# Altium PCB PCB1.PcbDoc
Units mm, origin at the board's own origin, x right, y up, seen from the top; angles counter-clockwise.
Board outline 87.76 x 52.71 mm, 2 copper layers (Top Layer, Bottom Layer); 13 components, 10 nets, 75 pads, 0 vias.
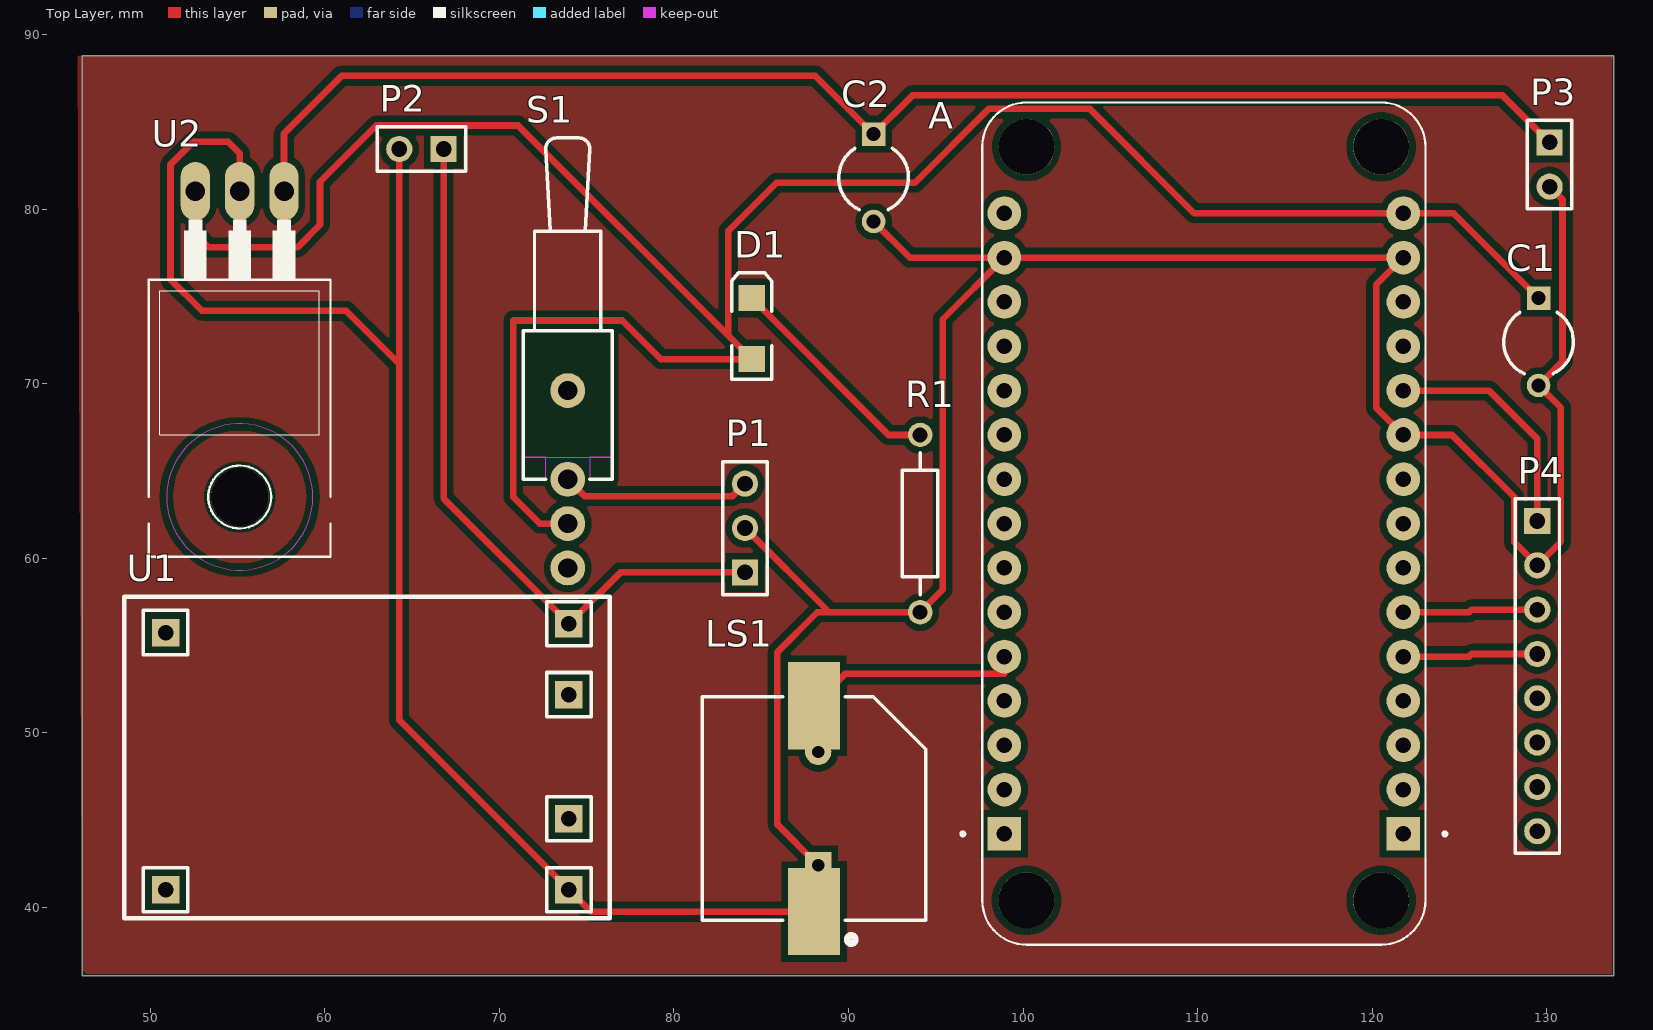
[diagram p0: Top Layer view]
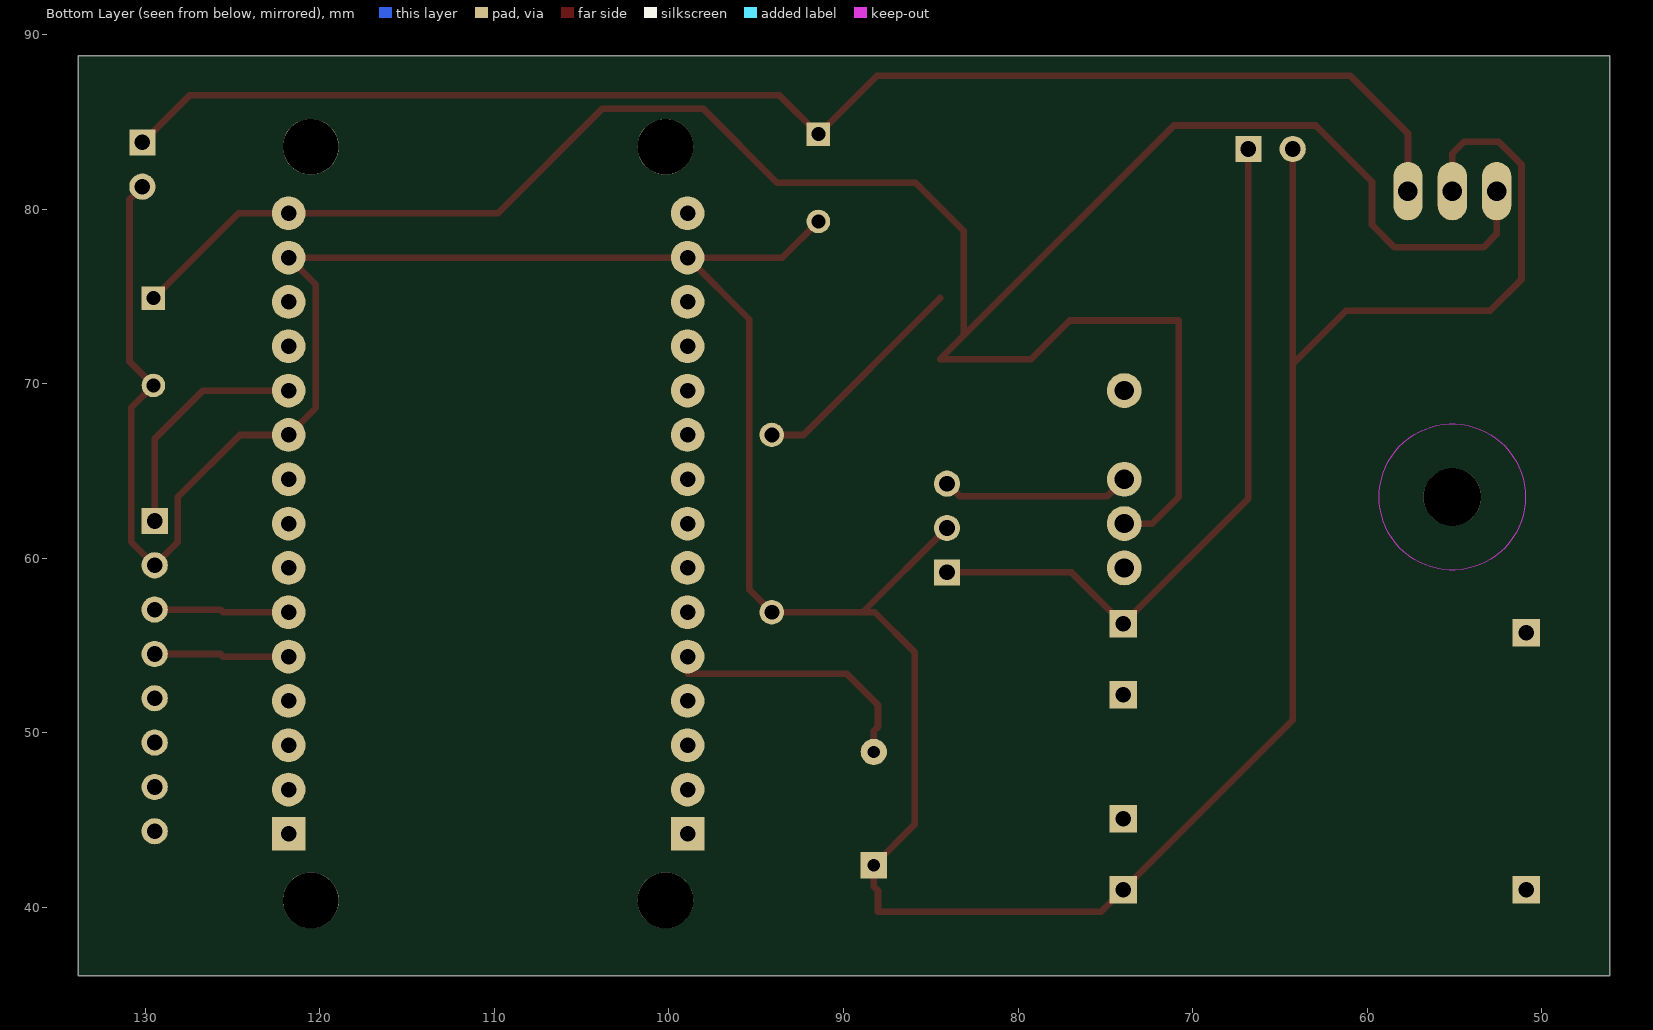
[diagram p1: Bottom Layer view, seen from below]

## Layer stack, top to bottom
Top Solder: solder mask 0.0102, Solder Resist, Dk 3.5
Top Layer: signal copper 0.0356
Dielectric 1: dielectric 0.32, FR-4, Dk 4.8
Bottom Layer: signal copper 0.0356
Bottom Solder: solder mask 0.0102, Solder Resist, Dk 3.5

## Board outline
46.101,88.773 133.858,88.773 133.858,36.069 46.101,36.067

## Design rules (kind name [scope] priority, off if disabled: settings)
Clearance [All] p1: gap=0.381 ignorepadtopadclearanceinfootprint=FALSE
DiffPairsRouting [All] p1: maxlimit=0.508 minlimit=0.381 mostfreqgap=0.381 toplayer_minwidth=0.381 toplayer_maxwidth=0.508 toplayer_prefwidth=0.381 bottomlayer_minwidth=0.381 bottomlayer_maxwidth=0.508 bottomlayer_prefwidth=0.381 maxuncoupledlength=12.7
PolygonConnect [All] p1: connectstyle=Relief reliefconductorwidth=0.254 reliefentries=4 polygonreliefangle="90 Angle" airgapwidth=0.254
RoutingCorners [All] p1: cornerstyle=45-Degree minsetback=3.81 maxsetback=3.81
RoutingLayers [All] p1: top layer_v5=TRUE bottom layer_v5=FALSE
RoutingVias [All] p1: holewidth=0.762 width=1.27 viastyle="Through Hole" minholewidth=0.762 minwidth=1.27 maxholewidth=0.762 maxwidth=1.27
SolderMaskExpansion [All] p1: expansion=0.102 istentingtop=FALSE
Width [All] p1: maxlimit=0.508 minlimit=0.381 preferedwidth=0.381
27 further rules are at their usual default settings.

## Components (designator, comment, footprint, x,y, rotation, side; value= is the part's Value field where it differs from the comment)
A "113990105" SEEED_113990105 110.363,61.976 r180 top
C1 "Cap2" CAPR5-4X5 129.54,72.39 r270 top value=100uF
C2 "Cap2" CAPR5-4X5 91.44,81.788 r270 top value=470uF
D1 "LED2" 3.2X1.6X1.1 84.455,73.152 r90 top
LS1 "Buzzer" ABSM-1574 88.025,39.745 r90 top
P1 "Boost Converter Module" HDR1X3 84.074,59.182 r90 top
P2 "Battery Connector" HDR1X2 66.802,83.439 r180 top
P3 "DCJ0202" HDR1X2 130.175,83.82 r270 top
P4 "MPU6050" HDR1X8 129.469,62.127 r270 top
R1 "Res2" AXIAL-0.4 94.107,61.976 r90 top value=220
S1 "SW-SPDT" TL36WW15050 73.914,64.516 r90 top
U1 "TP4056_module" PCBComponent_1 57.785,58.928 r0 top
U2 "LM7805" TO220 55.118,74.676 r180 top

## Footprints (in the part's own frame and the unit in brackets; to place one, negate y for a bottom-side part, rotate by r counter-clockwise, add the part's x,y. Pads: shape width x height; smd on the part's side, far side on the other; paste and mask are expansions set on the pad)
3.2X1.6X1.1 [mm] "SMT LED; 2 Flat Leads"
  rect 1.5x1.5 smd: 1(-1.75,0) 2(1.75,0)
  silkscreen extent -2.9,-1.15 3.2,1.15
ABSM-1574 [mm] "Magnetic Transducer Buzzer"
  rect 5x3 smd: 1(0,0) 2(11.8,0)
  rect 1.5x1.5 hole 0.7: 1A(2.65,-0.24)
  round 1.5 hole 0.7: 2A(9.15,-0.24)
  silkscreen extent -1.83,-6.4 12.3,6.4
AXIAL-0.4 [mm] "Axial Device, Thru-Hole; 2 Leads; 0.4 in Pin Spacing"
  round 1.4 hole 0.85: 1(-5.08,0) 2(5.08,0)
  silkscreen extent -4.06,-1.02 4.06,1.02
CAPR5-4X5 [mm] "Capacitor; 2 Leads"
  rect 1.35x1.35 hole 0.8: 1(-2.5,0)
  round 1.35 hole 0.8: 2(2.5,0)
  silkscreen extent -1.69,-2 1.82,2
HDR1X2 [mm] "Connector; Header; 2 Position"
  rect 1.5x1.5 hole 0.9: 1(0,0)
  round 1.5 hole 0.9: 2(2.54,0)
  silkscreen extent -1.27,-1.27 3.81,1.27
HDR1X3 [mm] "Connector; Header; 3 Position"
  rect 1.5x1.5 hole 0.9: 1(0,0)
  round 1.5 hole 0.9: 2(2.54,0) 3(5.08,0)
  silkscreen extent -1.27,-1.27 6.35,1.27
HDR1X8 [mm] "Connector; Header; 8 Position"
  rect 1.5x1.5 hole 0.9: 1(0,0)
  round 1.5 hole 0.9: 2(2.54,0) 3(5.08,0) 4(7.62,0) 5(10.16,0) 6(12.7,0) 7(15.24,0) 8(17.78,0)
  silkscreen extent -1.27,-1.27 19.05,1.27
PCBComponent_1 [mil]
  rect 62x62 hole 35: 1(-272.22,-125.95) 2(-272.22,-705.95) 3(637.78,-265.95) 4(637.78,-545.95) 5(637.78,-105.95) 6(637.78,-705.95)
  silkscreen extent -365,-770 730,-45
SEEED_113990105 [mm]
  rect 1.93x1.93 hole 0.889: J1_1(-11.43,17.78) J2_1(11.43,17.78)
  round 1.93 hole 0.889: J1_2(-11.43,15.24) J1_3(-11.43,12.7) J1_4(-11.43,10.16) J1_5(-11.43,7.62) J1_6(-11.43,5.08) J1_7(-11.43,2.54) J1_8(-11.43,0) J1_9(-11.43,-2.54) J1_10(-11.43,-5.08) J1_11(-11.43,-7.62) J1_12(-11.43,-10.16) J1_13(-11.43,-12.7) J1_14(-11.43,-15.24) J1_15(-11.43,-17.78) J2_2(11.43,15.24) J2_3(11.43,12.7) J2_4(11.43,10.16) J2_5(11.43,7.62) J2_6(11.43,5.08) J2_7(11.43,2.54) J2_8(11.43,0) J2_9(11.43,-2.54) J2_10(11.43,-5.08) J2_11(11.43,-7.62) J2_12(11.43,-10.16) J2_13(11.43,-12.7) J2_14(11.43,-15.24) J2_15(11.43,-17.78)
  round 3.2 hole 3.2 unplated: ""(-10.16,21.59) ""(-10.16,-21.59) ""(10.16,21.59) ""(10.16,-21.59)
  silkscreen extent -13.91,-24.13 13.91,24.13
TL36WW15050 [mm] "Switch; 4 Leads"
  round 2 hole 1.1: 1(0,0) 2(-2.54,0) 3(-5.08,0) M(5.08,0)
  Top Layer keep-out region: 1.27,2.54 1.27,-2.54 8.509,-2.54 8.509,2.54
  Top Layer keep-out region: 0,2.54 0,1.27 1.27,1.27 1.27,2.54
  Top Layer keep-out region: 0,-1.27 0,-2.54 1.27,-2.54 1.27,-1.27
  silkscreen extent 0,-2.54 19.56,2.54
TO220 [mil]
  oval 66x132 hole 44: 1(-100,-250) 2(0,-250) 3(100,-250)
  round 130 hole 130 unplated: ""(0,440)
  Keep-Out Layer circle w0: c0,440 r165
  Keep-Out Layer circle w0: c0,440 r165
  silkscreen extent -205,-185 205,575

## Part data
A: "An open-source firmware and development kit that helps you to Prototype your IOT product within a few Lua script lines", Package=None, Availability=Unavailable, MF="Seeed Technology", MP="NodeMCU v2", Price=None, SnapEDA_Link=https://www.snapeda.com/parts/NodeMCU%20v2/Seeed%20Technology%20Co.%2C%20Ltd/view-part/378076/?ref=snap
C1 C2: "Capacitor", PackageDescription="Capacitor; 2 Leads", PackageReference=CAPR5-4X5, Published=23-Sep-2002, Publisher="Altium Limited"
D1: "Typical RED, GREEN, YELLOW, AMBER GaAs LED", LatestRevisionDate=17-Jul-2002, LatestRevisionNote="Re-released for DXP Platform.", PackageDescription="SM LED; 2 Flat Leads", PackageReference=3.2X1.6X1.1, PackageVersion=Feb-2002, Published=8-Jun-2000, Publisher="Altium Limited"
LS1: "Magnetic Transducer Buzzer", ComponentLink1Description="Manufacturer Link", ComponentLink1URL=http://www.megastar.com/linecard/buzzmode/index.php, DatasheetVersion=17-Dec-2003, LatestRevisionDate=17-Dec-2003, LatestRevisionNote="Schematic revised, PCB Footprint replaced.", PackageDescription="Magnetic Transducer Buzzer", PackageReference=ABSM-1574, Published=24-Mar-1999, Publisher="Altium Limited"
P1: library part "Header 3", "Header, 3-Pin", LatestRevisionDate=17-Jul-2002, LatestRevisionNote="Re-released for DXP Platform.", Publisher="Altium Limited"
P2 P3: library part "Header 2", "Header, 2-Pin", LatestRevisionDate=17-Jul-2002, LatestRevisionNote="Re-released for DXP Platform.", Publisher="Altium Limited"
P4: library part "Header 8", "Header, 8-Pin", LatestRevisionDate=17-Jul-2002, LatestRevisionNote="Re-released for DXP Platform.", Publisher="Altium Limited"
R1: "Resistor", LatestRevisionDate=17-Jul-2002, LatestRevisionNote="Re-released for DXP Platform.", PackageDescription="Axial Device, Thru-Hole; 2 Leads; 0.4 in Pin Spacing", PackageReference=AXIAL-0.4, Published=8-Jun-2000, Publisher="Altium Limited"
S1: "SPDT Subminiature Toggle Switch, Right Angle Mounting, Vertical Actuation", ComponentLink1Description="Manufacturer Link", ComponentLink1URL=http://www.apem.com, DatasheetVersion=05-Dec-2000, LatestRevisionDate=17-Dec-2003, LatestRevisionNote="Schematic revised, PCB Footprint replaced.", PackageDescription="Switch; 4 Leads", PackageReference=TL36WW15050, Published=24-Mar-1999, Publisher="Altium Limited"
U2: "Linear Voltage Regulator IC 1 Output 1.5A SOT-223-4", Package="TO-220 Texas Instruments", Availability=Unavailable, MF="Texas Instruments", MP=LM7805, Price=None, SnapEDA_Link=https://www.snapeda.com/parts/LM7805/Texas%20Instruments/view-part/2302466/?ref=snap

## Nets (pads, with @x,y where several pads share a name; then routed paths per layer and width w, separated by ;. In a path a pad name is that pad's centre, name@x,y a point inside that pad or via, vN(x,y) a via of type N, cw(c..) or ccw(c..) an arc to the next point about the centre after c; other vN are vias at no path point)
5V: A.J1_15 C1.1 D1.1 S1.2 U2.3 | length 132.8
  Top Layer w0.381: U2.3 52.578,78.562 53.34,77.8 58.42,77.8 59.715,79.096 59.715,81.559 62.941,84.785 71.072,84.785 83.109,72.748 ; S1.2 72.314,61.976 70.79,63.5 70.79,73.609 77.038,73.609 79.245,71.402 D1.1 83.109,72.748 ; C1.1 124.674,79.756 A.J1_15 109.804,79.756 103.81,85.75 98.044,85.75 93.802,81.509 85.877,81.509 83.109,78.74 83.109,72.748
GND: A.J1_10 A.J1_14 A.J2_14 C1.2 C2.2 LS1.1 LS1.1A P1.2 P2.2 P3.2 P4.2 R1.1 U1.6 U2.2 | length 222.4
  Top Layer w0.381: U2.2 55.118,83.185 54.458,83.845 52.451,83.845 51.156,82.55 51.156,75.971 52.959,74.168 61.214,74.168 64.262,71.12 ; P2.2 64.262,71.12 ; P1.2 88.9,56.896 ; C2.2 93.512,77.216 A.J2_14 ; P3.2 130.912,80.543 130.912,71.262 C1.2 130.81,68.62 130.81,60.928 P4.2 128.143,60.913 128.143,63.5 124.587,67.056 A.J1_10 120.244,68.605 120.244,75.667 A.J1_14 A.J2_14 ; 64.262,71.12 64.262,50.72 U1.6 75.237,39.745 LS1.1 88.025,40.945 88.265,41.185 LS1.1A 85.928,44.732 85.928,54.61 88.214,56.896 88.9,56.896 ; 88.9,56.896 R1.1 95.402,58.191 95.402,73.685 A.J2_14
NetA_J1_5: A.J1_5 P4.4 | length 7.7
  Top Layer w0.381: A.J1_5 125.552,54.356 125.703,54.507 P4.4
NetA_J1_6: A.J1_6 P4.3 | length 7.7
  Top Layer w0.381: A.J1_6 125.552,56.896 125.703,57.047 P4.3
NetA_J1_11: A.J1_11 P4.1 | length 13.5
  Top Layer w0.381: A.J1_11 126.695,69.596 129.469,66.822 P4.1
NetA_J2_5: A.J2_5 LS1.2 LS1.2A | length 15.4
  Top Layer w0.381: LS1.2A 88.265,50.089 88.025,50.329 LS1.2 88.025,51.587 89.803,53.365 98.933,53.365 A.J2_5
NetC2_1: C2.1 P3.1 U2.1 | length 80.6
  Top Layer w0.381: U2.1 57.658,84.328 60.96,87.63 88.098,87.63 C2.1 93.664,86.512 127.483,86.512 P3.1
NetD1_2: D1.2 R1.2 | length 12.9
  Top Layer w0.381: D1.2 92.301,67.056 R1.2
NetP1_1: P1.1 P2.1 U1.5 | length 41.5
  Top Layer w0.381: P2.1 66.802,63.42 U1.5 76.93,59.182 P1.1
NetP1_3: P1.3 S1.1 | length 10.9
  Top Layer w0.381: S1.1 74.879,63.551 83.363,63.551 P1.3
pads on no net: A. A.J1_1 A.J1_2 A.J1_3 A.J1_4 A.J1_7 A.J1_8 A.J1_9 A.J1_12 A.J1_13 A.J2_1 A.J2_2 A.J2_3 A.J2_4 A.J2_6 A.J2_7 A.J2_8 A.J2_9 A.J2_10 A.J2_11 A.J2_12 A.J2_13 A.J2_15 P4.5 P4.6 P4.7 P4.8 S1.3 S1.M U1.1 U1.2 U1.3 U1.4 U2.

## Polygon pours and split planes (outlines as drawn)
no net on Top Layer "NONET_L01_P000" (solid, pour order 0): 45.847,88.773 133.985,88.773 133.731,88.519 133.731,36.195 46.355,36.195 46.101,36.449

## Dimensions
44.831,88.773 to 44.958,35.052 on Top Layer
46.228,34.798 to 133.985,34.798 on Top Layer

## Text inside footprints (layer, text, board x,y; h text height)
U2: Mechanical 13 "3" at 53.213,74.676 h1.27 r180; Mechanical 13 "2" at 55.754,74.676 h1.27 r180; Mechanical 13 "1" at 58.299,74.676 h1.27 r180